# EAGLE board untitled (EAGLE 7.3.0)
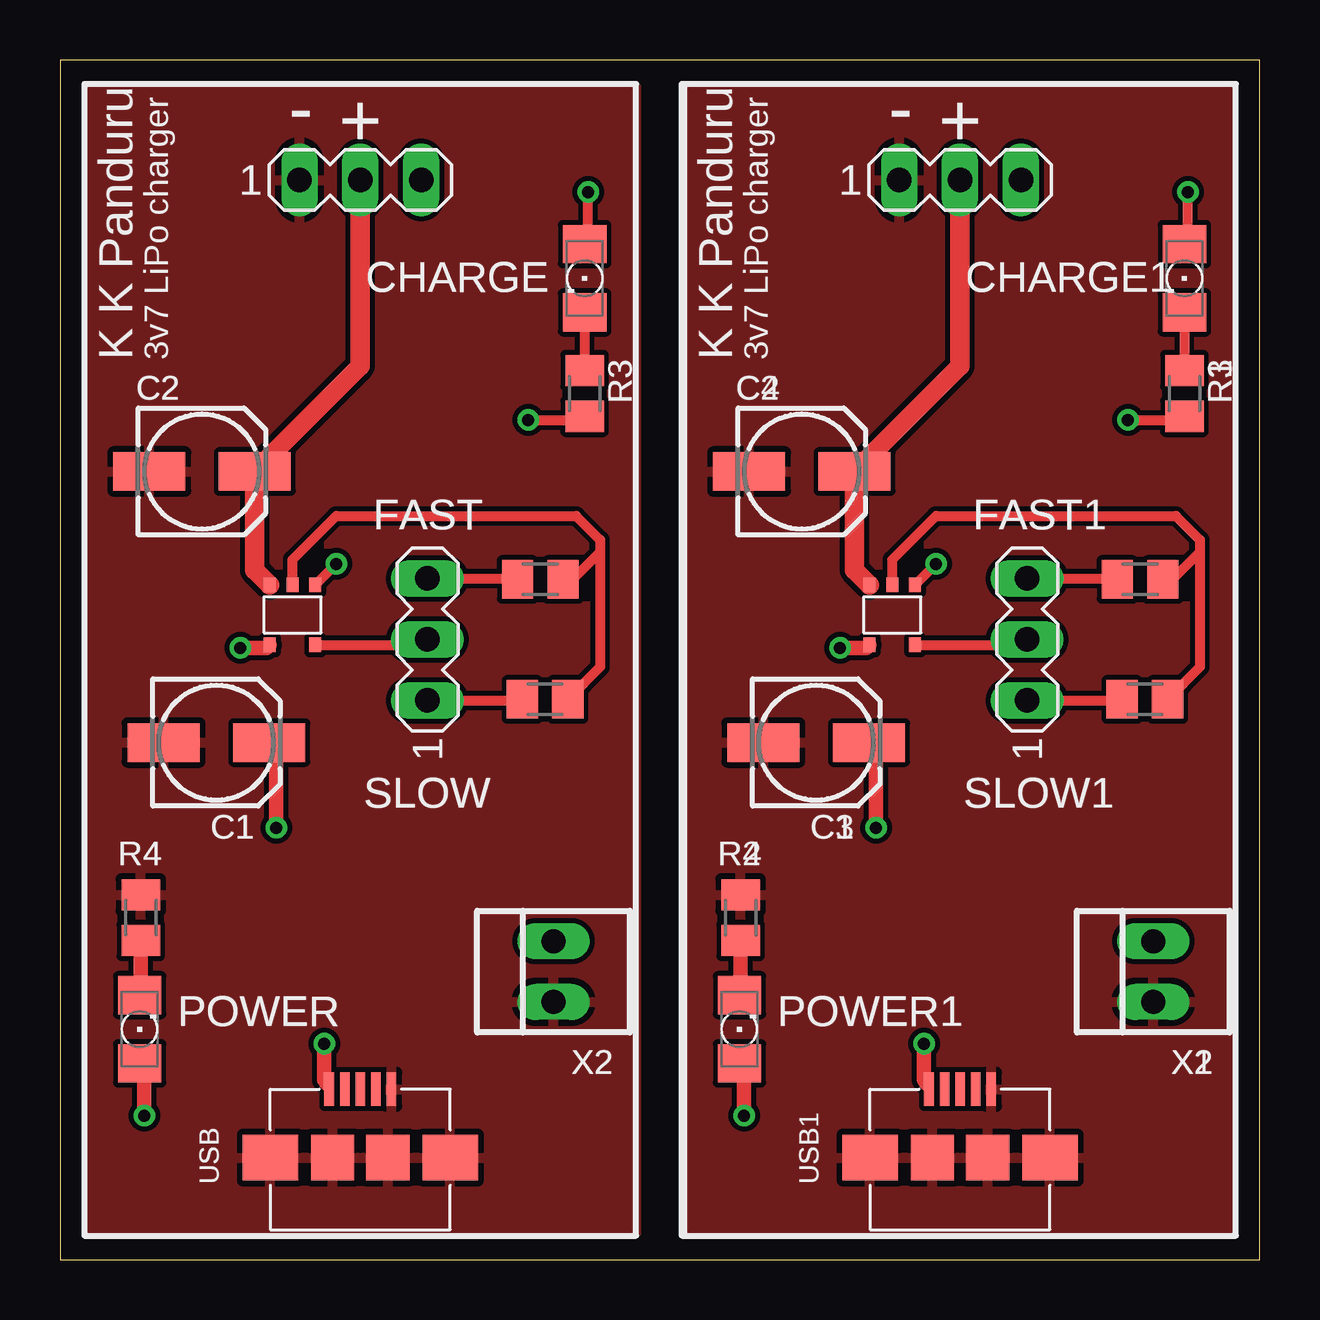
[diagram p0: board, top side]
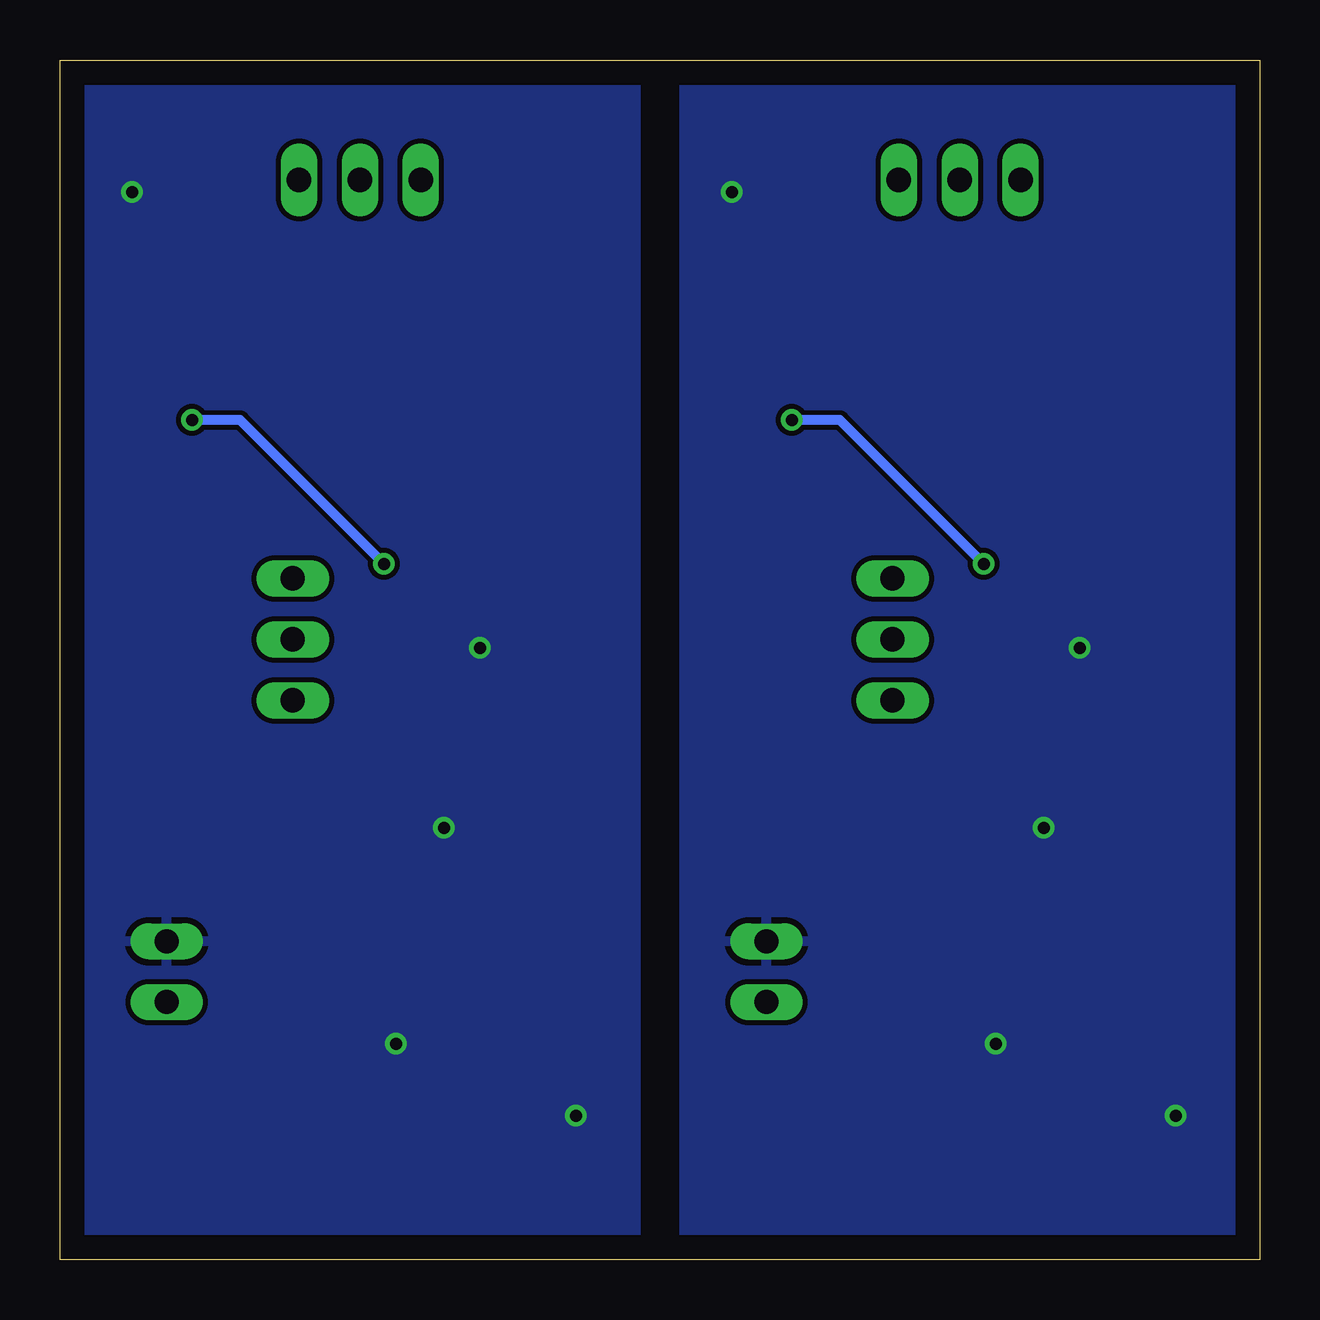
[diagram p1: board, bottom side, seen from below]

Size 50.02 x 50 mm. Coordinates in mm from the lower left corner, seen from the top.
Outline: 0.02,0 50.02,0 50.02,50 0,49.98 0.02,0
Copper layers (1*16): Top 0.035mm / dielectric 1.5mm / Bottom 0.035mm
Design rules "default": minimum track width 10mil, minimum drill 24mil, track to track 8mil, track to pad 8mil, pad to pad 8mil, via to via 8mil, smd to smd 8mil, copper to edge 40mil, drill to drill 8mil, minimum pad ring 10mil, minimum via ring 8mil, stop-mask expansion 4mil, vias tented up to drill 0mil, thermal gap 10mil

## Footprints (pad centres in the part's own frame; a part is rotated, then mirrored left to right if it is on the bottom)
153CLV-0505 = smd 3 x 1.6: + 2.2,0; - -2.2,0
MA03-1 = drill 1.016 long: 1 -2.54,0; 2 0,0; 3 2.54,0
LED_1206 = smd 1.6 x 1.803: A -1.422,0; C 1.422,0
M0805 = smd 1.3 x 1.6: 1 -0.95,0; 2 0.95,0
SOT23-5 = smd 0.5 x 0.6: 1 0.95,1.55; 2 0,1.55; 3 -0.95,1.55; 4 -0.95,-0.95; 5 0.95,-0.95
UUSB_B_RECEPTABLE = smd 0.4 x 1.4: 1 -1.3,2.85; 2 -0.65,2.85; 3 0,2.85; 4 0.65,2.85; 5 1.3,2.85 | smd 2.3 x 1.9: X1 -3.75,0; X4 3.75,0 | smd 1.8 x 1.9: X2 -1.15,0; X3 1.15,0
22-23-2021 = drill 1 long: 1 -1.27,0; 2 1.27,0

## Placement (x,y rotation side)
C1  4u7  [153CLV-0505]  6.52,21.55 0 top
C2  4u7  [153CLV-0505]  5.92,32.85 0 top
C3  4u7  [153CLV-0505]  31.52,21.55 0 top
C4  4u7  [153CLV-0505]  30.92,32.85 0 top
C_SEL  X1  [MA03-1]  15.32,25.85 90 top
C_SEL1  X1  [MA03-1]  40.32,25.85 90 top
CHARGE  D1  [LED_1206]  21.87,40.9 270 top
CHARGE1  D1  [LED_1206]  46.87,40.9 270 top
FAST  2k2  [M0805]  20.02,28.35 180 top
FAST1  2k2  [M0805]  45.02,28.35 180 top
LIPOBATT  X2  [MA03-1]  12.52,45 0 top
LIPOBATT1  X2  [MA03-1]  37.52,45 0 top
POWER  D2  [LED_1206]  3.32,9.6 90 top
POWER1  D2  [LED_1206]  28.32,9.6 90 top
R1  220e  [M0805]  46.87,36.1 90 top
R2  220e  [M0805]  28.37,14.25 90 top
R3  220e  [M0805]  21.87,36.1 90 top
R4  220e  [M0805]  3.37,14.25 90 top
SLOW  10k  [M0805]  20.22,23.35 180 top
SLOW1  10k  [M0805]  45.22,23.35 180 top
U$1  MCP73831  [SOT23-5]  9.69,26.57 0 top
U$2  MCP73831  [SOT23-5]  34.69,26.57 0 top
USB  2293753  [UUSB_B_RECEPTABLE]  12.52,4.25 0 top
USB1  2293753  [UUSB_B_RECEPTABLE]  37.52,4.25 0 top
X1  22-23-2021  [22-23-2021]  45.57,12 90 top
X2  22-23-2021  [22-23-2021]  20.57,12 90 top

## Library data of the parts
C1-C4 FAST FAST1 R1-R4 SLOW SLOW1 = rcl
C_SEL C_SEL1 LIPOBATT LIPOBATT1 = con-lstb; OC_FARNELL: unknown; OC_NEWARK: unknown
CHARGE CHARGE1 POWER POWER1 = eagle-ltspice; SPICEMODEL: NONE; SPICEPREFIX: D; SPICETYPE: diode
U$1 U$2 USB USB1 = lipoLib
X1 X2 = con-molex; MF: MOLEX; MPN: 22-23-2021; OC_FARNELL: 1462926; OC_NEWARK: 25C3832

## Nets
GND: C1.- C2.- LIPOBATT.1 R4.2 USB.5 USB.X1 USB.X2 USB.X3 USB.X4 X2.1
GND1: C3.- C4.- LIPOBATT1.1 R2.2 USB1.5 USB1.X1 USB1.X2 USB1.X3 USB1.X4 X1.1
N$1: C_SEL.1 SLOW.2
N$2: C_SEL.3 FAST.2
N$3: FAST.1 SLOW.1 U$1.2
N$4: C_SEL.2 U$1.5
N$5: C_SEL1.1 SLOW1.2
N$6: C2.+ LIPOBATT.2 U$1.3
N$7: R3.1 U$1.1
N$8: CHARGE.C R3.2
N$9: POWER.C R4.1
N$10: C_SEL1.3 FAST1.2
N$11: FAST1.1 SLOW1.1 U$2.2
N$12: C4.+ LIPOBATT1.2 U$2.3
N$13: R1.1 U$2.1
N$14: CHARGE1.C R1.2
N$15: POWER1.C R2.1
N$16: C_SEL1.2 U$2.5
VDD: C1.+ CHARGE.A POWER.A U$1.4 USB.1 X2.2
VDD1: C3.+ CHARGE1.A POWER1.A U$2.4 USB1.1 X1.2

## Tracks (layer width: path | path; a pad name or v marks a point on that pad's centre or on a via)
GND
  pour Top: 1.02,49 24.02,49 24.02,1 1.02,1
GND1
  pour Top: 26.02,49 49.02,49 49.02,1 26.02,1
N$1
  Top 0.406: C_SEL.1 19.23,23.31 SLOW.2
N$2
  Top 0.406: C_SEL.3 19.03,28.39 FAST.2
N$3
  Top 0.406: U$1.2 9.69,29.17 11.52,31 21.52,31 22.52,30 22.52,29.5 | 22.52,29.5 22.52,24.7 SLOW.1 | FAST.1 21.37,28.35 22.52,29.5
N$4
  Top 0.406: U$1.5 15.09,25.62 C_SEL.2
N$5
  Top 0.406: C_SEL1.1 44.23,23.31 SLOW1.2
N$6
  Top 0.813: U$1.3 8.12,28.74 C2.+ 12.52,37.25 LIPOBATT.2
N$7  (via drill 0.5)
  Top 0.406: U$1.1 v11.52,29 | v19.52,35 21.72,35 R3.1
  Bottom 0.406: v11.52,29 17.52,35 v19.52,35
N$8
  Top 0.406: CHARGE.C R3.2
N$9
  Top 0.61: POWER.C 3.37,11.07 R4.1
N$10
  Top 0.406: C_SEL1.3 44.03,28.39 FAST1.2
N$11
  Top 0.406: U$2.2 34.69,29.17 36.52,31 46.52,31 47.52,30 47.52,29.5 | 47.52,29.5 47.52,24.7 SLOW1.1 | FAST1.1 46.37,28.35 47.52,29.5
N$12
  Top 0.813: U$2.3 33.12,28.74 C4.+ 37.52,37.25 LIPOBATT1.2
N$13  (via drill 0.5)
  Top 0.406: U$2.1 v36.52,29 | v44.52,35 46.72,35 R1.1
  Bottom 0.406: v36.52,29 42.52,35 v44.52,35
N$14
  Top 0.406: CHARGE1.C R1.2
N$15
  Top 0.61: POWER1.C 28.37,11.07 R2.1
N$16
  Top 0.406: U$2.5 40.09,25.62 C_SEL1.2
VDD  (via drill 0.5)
  Top 0.406: CHARGE.A 22.02,42.47 v22.02,44.5 | USB.1 11.02,7.3 11.02,7.5
  Top 0.61: U$1.4 8.62,25.5 v7.52,25.5 | C1.+ 9.02,21.25 v9.02,18 | POWER.A 3.52,7.98 v3.52,6 | 11.02,7.5 v11.02,9
  pour Bottom: 1.02,49 24.02,49 24.02,1 1.02,1
VDD1  (via drill 0.5)
  Top 0.406: CHARGE1.A 47.02,42.47 v47.02,44.5 | USB1.1 36.02,7.3 36.02,7.5
  Top 0.61: U$2.4 33.62,25.5 v32.52,25.5 | C3.+ 34.02,21.25 v34.02,18 | POWER1.A 28.52,7.98 v28.52,6 | 36.02,7.5 v36.02,9
  pour Bottom: 26.02,49 49.02,49 49.02,1 26.02,1

## Text on the board
tPlace: - | + | - | + | K K Panduru | 3v7 LiPo charger | K K Panduru | 3v7 LiPo charger
_tNames: CHARGE | CHARGE | CHARGE | CHARGE | C2 | C2 | R3 | R3 | C2 | C2 | R3 | R3 | FAST | FAST | FAST | FAST | SLOW | SLOW | SLOW | SLOW | C1 | C1 | C1 | C1 | R4 | R4 | R4 | R4 | POWER | POWER | POWER | POWER | X2 | X2 | X2 | X2 | USB | USB | USB | USB